# Altium PCB USB_Audio_DAC_REV1.PcbDoc
Units mil, origin at the board's own origin, x right, y up, seen from the top; angles counter-clockwise.
Board outline 2265 x 1500 mil, 2 copper layers (Top Layer, Bottom Layer); 55 components, 40 nets, 174 pads, 20 vias.
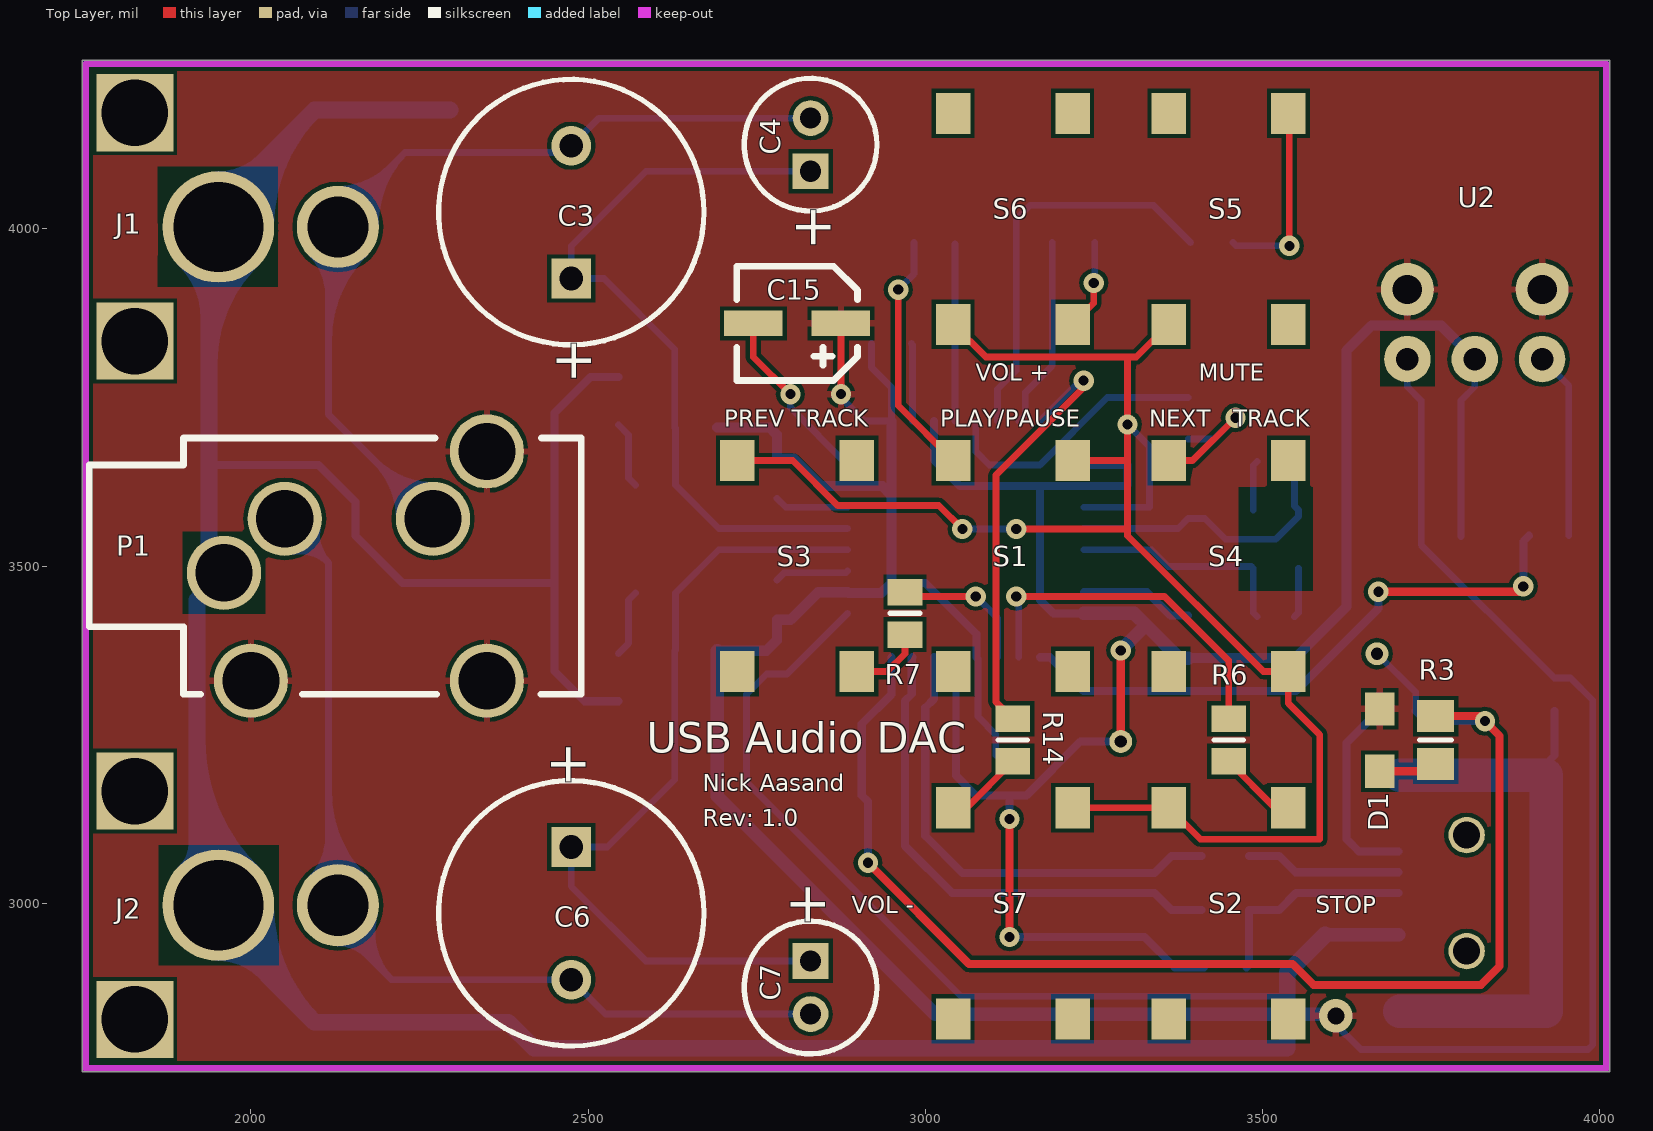
[diagram p0: Top Layer view]
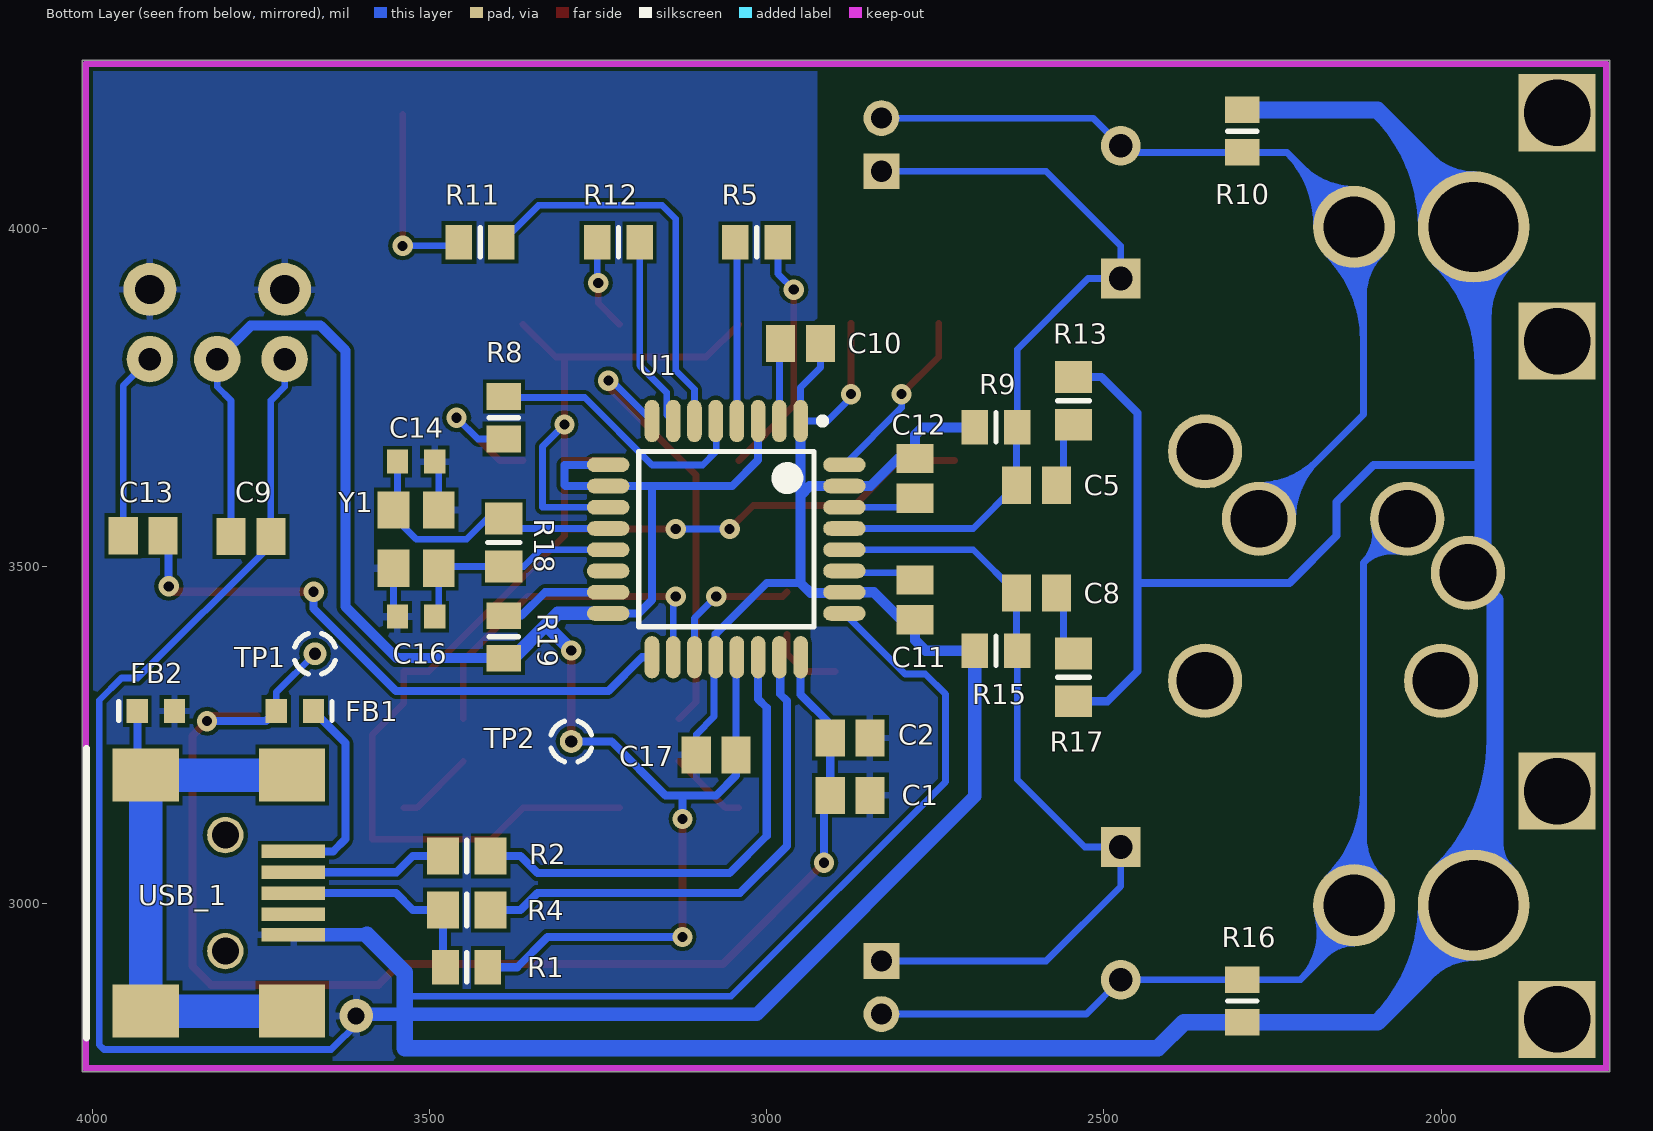
[diagram p1: Bottom Layer view, seen from below]

## Layer stack, top to bottom
Top Layer: signal copper 1.4
Dielectric: dielectric 12.6, FR-4, Dk 4.8
Bottom Layer: signal copper 1.4

## Board outline
1750,2750 4015,2750 4015,4250 1750,4250

## Design rules (kind name [scope] priority, off if disabled: settings)
Clearance [All] p1: gap=6
ComponentClearance [All] p1: gap=8 collisioncheckmode=3 verticalgap=8 showdistances=FALSE
HoleSize [All] p1: absolutevalues=TRUE maxlimit=250 minlimit=13 maxpercent=80.000 minpercent=20.000
MinimumAnnularRing [All] p1: minimumring=7
MinimumSolderMaskSliver [All] p1: minsoldermaskwidth=1
PolygonConnect [All] p1: connectstyle=Relief reliefconductorwidth=10 reliefentries=4 polygonreliefangle="90 Angle"
RoutingVias [All] p1: holewidth=13 width=27 viastyle="Through Hole" minholewidth=13 minwidth=27 maxholewidth=25 maxwidth=50
SilkscreenOverComponentPads [All] p1: minsilkscreentomaskgap=6
SolderMaskExpansion [All] p1: expansion=4
Width [All] p1: maxlimit=50 minlimit=8 preferedwidth=8 minimp=50.000000 maximp=50.000000 favimp=50.000000
24 further rules are at their usual default settings.

## Components (designator, comment, footprint, x,y, rotation, side; value= is the part's Value field where it differs from the comment)
C1 "0805" C0805 2876.38,3160 r180 bottom
C2 "0805" C0805 2876.38,3245 r180 bottom
C3 "Cap" CAPPR5-10x12.5 2475,4025 r90 top
C4 "Cap" CAPPR2-5x11 2830,4125 r90 top
C5 "0805" C0805 2600,3620 r180 bottom
C6 "Cap" CAPPR5-10x12.5 2475,2985 r270 top
C7 "Cap" CAPPR2-5x11 2830,2875 r270 top
C8 "0805" C0805 2600,3460 r180 bottom
C9 "Cap Semi" C0805 3765,3544 r180 bottom
C10 "0805" C0805 2950,3830 r180 bottom
C11 "0805" C0805 2780,3450 r270 bottom
C12 "0805" C0805 2780,3630 r90 bottom
C13 "Cap Semi" C0805 3925,3545 r0 bottom
C14 "0805" CAPC1608L 3520,3655 r0 bottom
C15 "Cap Pol3" Cap_ALUM_SMD 2745,3860 r0 top
C16 "0805" CAPC1608L 3520,3425 r180 bottom
C17 "0805" C0805 3075,3220 r0 bottom
D1 "LED2" "2.00mm L x 1.25mm W" 3674,3195.74 r90 top
FB1 "0603" INDC1608L 3700,3285 r0 bottom
FB2 "0603" INDC1608L 3906,3285 r180 bottom
J1 "RCJ-04X" RCJ-04X 2129,4003 r180 top
J2 "RCJ-04X" RCJ-04X 2129,2997 r180 top
P1 "SJ1-3533NS" SJ1-3533NS 1960,3530 r0 top
R1 "0805" RESC2012L 3445,2905 r0 bottom
R2 "Res3" 6-0805_N 3445,3070 r180 bottom
R3 "Res3" 6-0805_N 3757,3242 r90 top
R4 "Res3" 6-0805_N 3445,2990 r180 bottom
R5 "0805" RESC2012L 3015,3980 r0 bottom
R6 "0805" RESC2012L 3450,3242 r90 top
R7 "0805" RESC2012L 2970,3430 r90 top
R8 "0805" RESC2012L 3390,3720 r90 bottom
R9 "0805" RESC2012L 2660,3705.63 r180 bottom
R10 "0805" RESC2012L 2295,4145 r270 bottom
R11 "0805" RESC2012L 3425,3980 r180 bottom
R12 "0805" RESC2012L 3220,3980 r180 bottom
R13 "Res3" 6-0805_N 2545,3745 r270 bottom
R14 "0805" RESC2012L 3130,3242 r90 top
R15 "0805" RESC2012L 2660,3374.37 r180 bottom
R16 "0805" RESC2012L 2295,2855 r90 bottom
R17 "Res3" 6-0805_N 2545,3335 r90 bottom
R18 "Res3" 6-0805_N 3390,3535 r90 bottom
R19 "0805" RESC2012L 3390,3395 r270 bottom
S1 "SW" C&K_PTS645_SMD 3130,3500 r90 top
S2 "SW" C&K_PTS645_SMD 3450,2985 r270 top
S3 "SW" C&K_PTS645_SMD 2810,3500 r270 top
S4 "SW" C&K_PTS645_SMD 3450,3500 r90 top
S5 "SW" C&K_PTS645_SMD 3450,4015 r270 top
S6 "SW" C&K_PTS645_SMD 3130,4015 r270 top
S7 "SW" C&K_PTS645_SMD 3130,2985 r90 top
TP1 "Test point" Test_Pad 3670,3370 r0 bottom
TP2 "Test point" Test_Pad 3290,3240 r270 bottom
U1 "PCM2706C/7C" TQFP80P970X970X120-32N 3060,3540 r270 bottom
U2 "PLT133/T6A" PLT133/T10W 3715,3807 r0 top
USB_1 "USB-M2xFxx" USB-M2xFxx 3655,3015 r270 bottom
Y1 "12MHz" TXC-7M 3520,3540 r90 bottom

## Footprints (in the part's own frame and the unit in brackets; to place one, negate y for a bottom-side part, rotate by r counter-clockwise, add the part's x,y. Pads: shape width x height; smd on the part's side, far side on the other; paste and mask are expansions set on the pad)
"2.00mm L x 1.25mm W" [mm] "0805 SMT LED 2 Flat Leads"
  rect 1.25x1.1 smd: 1(0,0) 2(2.35,0)
6-0805_N [mm] "Chip Resistor, Body 2.0x1.2mm, IPC Medium Density"
  rect 1.2x1.4 smd: 1(-0.9,0) 2(0.9,0)
  silkscreen extent 0,-0.6 0,0.6, body extent -1.07,-0.7 1.07,0.7, height 0.7
C0805 [mm] "Chip Capacitor, Body 2.0x1.3mm, IPC High Density"
  rect 1.1x1.4 smd: 1(-0.75,0) 2(0.75,0)
  body extent -1.1,-0.72 1.1,0.72, height 1.4
C&K_PTS645_SMD [mm]
  rect 1.55x1.3 smd: 1(-3.975,2.25) 2(-3.975,-2.25) 3(3.975,2.25) 4(3.975,-2.25)
  body extent -3.13,-3.13 3.13,3.13, height 5
Cap_ALUM_SMD [mm] "Cap Electrolytic SMD Radial, Can"
  rect 2.2x0.95 smd: 1(0,0) 2(3.3,0)
  silkscreen extent -0.62,-2.15 3.92,2.15
CAPC1608L [mm] "Chip Capacitor, Body 1.6x0.8mm, IPC High Density"
  rect 0.8x0.9 smd: 1(-0.7,0) 2(0.7,0)
  body extent -0.87,-0.48 0.87,0.48, height 0.85
CAPPR2-5x11 [mm] "Capacitor, Electrolytic, Radial; Body 5 x 11 mm (Dia.xH typ); Pin Spacing 2 mm (typ)"
  rect 1.35x1.35 hole 0.8: 1(-1,0)
  round 1.35 hole 0.8: 2(1,0)
  silkscreen extent -2.5,-2.5 2.5,2.5
CAPPR5-10x12.5 [mm] "Capacitor, Electrolytic, Radial; Body 10 x 12.5 mm (Dia.xH typ); Pin Spacing 5 mm (typ)"
  rect 1.5x1.5 hole 0.9: 1(-2.5,0)
  round 1.5 hole 0.9: 2(2.5,0)
  silkscreen extent -5,-5 5,5
INDC1608L [mm] "Chip Inductor, Body 1.6x0.8mm, IPC High Density"
  rect 0.8x0.9 smd: 1(-0.7,0) 2(0.7,0)
  silkscreen extent -1.4,-0.35 -1.4,0.35, body extent -0.87,-0.48 0.87,0.48, height 0.55
PLT133/T10W [mm] "S/PDIF Optical Transmitter Integrated Drive Circuitry"
  round 1.75 hole 0.85: 1(0,0) 2(2.54,0) 3(5.08,0)
  round 2 hole 1.1: 4(0,2.625) 5(5.08,2.625)
RCJ-04X [mm] "RCJ-04X series RCA mono audio jack"
  round 4.2 hole 3.4: 1(4.5,0)
  round 3.1 hole 2.3: 2(0,0)
  rect 2.906x2.906 hole 2.5 unplated: 3(7.65,4.3) 4(7.65,-4.3)
RESC2012L [mm] "Chip Resistor, Body 2.0x1.3mm, IPC High Density"
  rect 1x1.3 smd: 1(-0.8,0) 2(0.8,0)
  silkscreen extent 0,-0.55 0,0.55, body extent -1.07,-0.7 1.07,0.7, height 0.65
SJ1-3533NS [mil] "Audio Jack"
  round 110 hole 85: 1(0,-40) 2(90,40) 3(310,40) 4(40,-200) 5(390,-200) 6(390,140)
  silkscreen extent -200,-220 530,160
Test_Pad [mil] "Test point pad"
  round 34 hole 18: 1(0,0)
  silkscreen extent -30,-30 30,30
TQFP80P970X970X120-32N [mm] "TQFP, 32-Leads, Body 9.7x9.7mm (max), Pitch 0.80mm, IPC Medium Density"
  oval 1.6x0.55 smd: 1(-4.45,2.8) 2(-4.45,2) 3(-4.45,1.2) 4(-4.45,0.4) 5(-4.45,-0.4) 6(-4.45,-1.2) 7(-4.45,-2) 8(-4.45,-2.8) 17(4.45,-2.8) 18(4.45,-2) 19(4.45,-1.2) 20(4.45,-0.4) 21(4.45,0.4) 22(4.45,1.2) 23(4.45,2) 24(4.45,2.8)
  oval 0.55x1.6 smd: 9(-2.8,-4.45) 10(-2,-4.45) 11(-1.2,-4.45) 12(-0.4,-4.45) 13(0.4,-4.45) 14(1.2,-4.45) 15(2,-4.45) 16(2.8,-4.45) 25(2.8,4.45) 26(2,4.45) 27(1.2,4.45) 28(0.4,4.45) 29(-0.4,4.45) 30(-1.2,4.45) 31(-2,4.45) 32(-2.8,4.45)
  silkscreen extent -4.57,-3.3 3.3,3.75, body extent -3.5,-3.5 3.5,3.5, height 1.2
TXC-7M [mm] "TXC 7M Series Crystal"
  rect 1.4x1.2 smd: 1(-1.1,-0.85) 2(1.1,-0.85) 3(1.1,0.85) 4(-1.1,0.85)
USB-M2xFxx [mil] "USB Mini B connector SMD"
  rect 20x94 smd: 1(-62,-47) 2(-31,-47) 3(0,-47) 4(31,-47) 5(62,-47)
  rect 79x98 smd: 6(-175,-49) 7(-175,-266) 8(175,-266) 9(175,-49)
  round 54 hole 40: ""(-86,-148) ""(86,-148)
  silkscreen extent -215,-354 215,-354

## Part data
C1 C2 C5 C8 C10 C11 C12 C14 C16 C17: library part "Cap Semi", "Capacitor (Semiconductor SIM Model)"
C3 C4 C6 C7: "Capacitor"
C9 C13: "Capacitor (Semiconductor SIM Model)"
C15: "Polarized Capacitor (Surface Mount)"
D1: "Typical RED, GREEN, YELLOW, AMBER GaAs LED"
FB1 FB2: library part Inductor, "Inductor"
J1 J2: "RCJ-04X series RCA connector"
P1: "CUI 3.5mm Audio Jack Shielded"
R1 R5 R6 R7 R8 R9 R10 R11 R12 R14 R15 R16 R19: library part Res3, "Resistor"
R2 R3 R4 R13 R17 R18: "Resistor"
S1 S2 S3 S4 S5 S6 S7: library part SPST-4, "SPST Tactile switch - generic"
TP1 TP2: library part Test_Pad, "Test point pad"
U1: library part PCM2707, "Stereo Audio DAC with USB Interface, Single-Ended Headphone Out, S/PDIF Output"
U2: "TRANSMITTER FBR OPT IR PHOTOLINK 660nm"
USB_1: "USB Mini-B for USB-M2xFxx"
Y1: library part XTAL-4, "Crystal Oscillator - 4 Pin"

## Via types
v1: diameter 30, hole 15, Top Layer to Bottom Layer, 19 vias
v2: diameter 50, hole 25, Top Layer to Bottom Layer, 1 vias

## Nets (pads, with @x,y where several pads share a name; then routed paths per layer and width w, separated by ;. In a path a pad name is that pad's centre, name@x,y a point inside that pad or via, vN(x,y) a via of type N, cw(c..) or ccw(c..) an arc to the next point about the centre after c; other vN are vias at no path point)
FUNC0: R8.2 U1.5 | length 410.2
  Bottom Layer w10: U1.5 3075,3714.45 3075,3670 3095,3650 3170,3650 3270,3750 R8.2@3390,3750
FUNC1: R7.2 U1.19 | length 211.2
  Top Layer w10: R7.2 2976.5,3455 v1(3075,3455)
  Bottom Layer w10: v1(3075,3455) 3107.24,3422.76 U1.19
FUNC2: R6.2 U1.18 | length 532.6
  Top Layer w10: v1(3135,3455) 3355,3455 3450,3360 R6.2
  Bottom Layer w10: v1(3135,3455) 3138.74,3451.26 U1.18
FUNC3: R5.2 U1.4 | length 262.6
  Bottom Layer w10: U1.4 R5.2@3044.25,3977.76
GND: C1.2 C2.2 C9.2 C10.2 C11.2 C12.2 C14.1 C15.2 C16.1 C17.2 D1.2 FB2.2 J1.1 J2.1 P1.1 P1.4 P1.5 P1.6 R9.1 R10.1 R13.1 R15.1 R16.1 R17.1 U1.1 U1.20 U1.25 U1.26 U1.31 U2.1 U2.4 U2.5 USB_1.5 Y1.2 Y1.4 | length 12542.1
  Top Layer w10: v1@2874.92,3750.08 v1@2875,3750 ; C15.2 2875,3859.92 v1(2875,3755)
  Bottom Layer w10: v1(2875,3755) 2875,3750 2909.8,3715.2 U1.1 2950,3715.43 2950,3765 2920.47,3794.53 C10.2 ; U1.25 2795.04,3340 2765,3340 2735,3310 2735,3180 3053,2862 3537,2862 ; U1.26 U1.26@2886.06,3460 ; U1.20 3078.13,3362.43 3078.13,3276.87 3104.53,3250.47 C17.2 ; Y1.2 3486.54,3649.09 C14.1 ; C16.1 3553.46,3430.91 Y1.4 ; v2@3605,2835 3605,2824 3646,2783 3983,2783 3990,2790 3990,3301 3957,3334 3933,3334 3735.47,3531.53 C9.2 3735.47,3745.53 3715,3766 U2.1
  Bottom Layer w12: 1937.83,3650 2100,3650 2155,3595 2155,3545 2225,3475 2450,3475 ; R17.1 2494.43,3299.57 2450,3344 2450,3475 ; R13.1 2503.43,3780.43 2450,3727 2450,3475 ; 2950,3475 3000,3475 3075.75,3399.25 U1.20 ; 3537,2862 3542,2862
  Bottom Layer w15: R15.1 2764.37,3374.37 2780,3390 C11.2 2800.47,3420.47 2841.26,3461.26 U1.26 ; R9.1 2769.37,3705.63 2780,3695 C12.2 2805.47,3659.53 2846.26,3618.74 U1.31 2936.26,3618.74 2949.76,3605.24 ; U1.26@2886.06,3460 2935,3460 2950,3475 2950,3605 2949.76,3605.24 ; U1.1 2949.76,3605.24
  Bottom Layer w20: R15.1 2691.5,3158.5 3015,2835 3537,2835 3605,2835 v2@3607,2833 ; 3593,2953 USB_1.5
  Bottom Layer w25: J2.1@1902.21,3046.62 ccw(c1859.27,3089.57) 1920,3089.57 ; J1.1@1902.21,3953.38 cw(c1816.21,3867.38) 1937.83,3867.38 ; 1920,3122.57 ccw(c2077.4,3122.57) J2.1@1966.1,3011.27 ; 1920,3182.92 ccw(c2137.76,3182.92) J2.1@1983.78,3028.95 ; 1920,3243.28 ccw(c2198.11,3243.28) J2.1@2001.46,3046.62 ; 1937.83,3799.78 cw(c2155.06,3799.78) J1.1@2001.46,3953.38 ; 1937.83,3860.13 cw(c2094.7,3860.13) J1.1@1983.78,3971.05 ; 1937.83,3920.49 cw(c2034.35,3920.49) J1.1@1966.1,3988.73 ; J2.1@1951.83,2926.82 cw(c1951.83,2832.24) 2018.71,2899.12 ; J1.1@1951.83,4073.18 ccw(c1951.83,4167.76) 2018.71,4100.88 ; J2.1@1972.01,2997 ccw(c2095.56,2997) 2008.2,2909.64 ; J1.1@1972.01,4003 cw(c2095.56,4003) 2008.2,4090.36 ; J2.1@1997.01,2997 ccw(c2180.92,2997) 2050.88,2866.96 ; J1.1@1997.01,4003 cw(c2180.92,4003) 2050.88,4133.04 ; J2.1@2022.01,2997 ccw(c2266.27,2997) 2093.55,2824.28 ; J1.1@2022.01,4003 cw(c2266.27,4003) 2093.55,4175.72 ; R10.1 2094.33,4176.5 1951.83,4034 J1.1 1937.83,3989 1937.83,3650 1937.83,3512.17 P1.1 1920,3450 1920,3028.83 J2.1 1951.83,2966 2094.33,2823.5 R16.1 2381.5,2823.5 2420,2785 3537,2785 3537,2835 3537,2862 3537,2897 3593,2953
  other v2: 3609,2833
HID0: R11.2 U1.6 | length 600.9
  Bottom Layer w10: U1.6 3107.24,3762.24 3135,3790 3135,4015 3155,4035 3338.5,4035 R11.2
HID1: R12.2 U1.7 | length 285.4
  Bottom Layer w10: U1.7 3148.41,3724.87 3148.41,3757.69 3188.5,3797.79 R12.2
HID2: R14.2 U1.8 | length 655.2
  Top Layer w10: R14.2 3105,3298.5 3105,3635 3235,3765 v1(3235,3775)
  Bottom Layer w10: U1.8 3230.04,3775 v1(3235,3775)
NetC3_2: C3.2 C4.2 J1.2 P1.3 R10.2 | length 2940.3
  Bottom Layer w10: J1.2@2089.39,3963.39 cw(c2027.55,3901.55) 2115,3901.55 ; J1.2@2096.46,3970.46 cw(c2051.69,3925.69) 2115,3925.69 ; 2115,3833.95 cw(c2298.05,3833.95) J1.2@2168.61,3963.39 ; 2115,3858.09 cw(c2273.91,3858.09) J1.2@2161.54,3970.46 ; 2115,3882.23 cw(c2249.77,3882.23) J1.2@2154.47,3977.53 ; 2115,3906.37 cw(c2225.63,3906.37) J1.2@2147.4,3984.6 ; 2115,3930.52 cw(c2201.48,3930.52) J1.2@2140.33,3991.67 ; J1.2@2129,4039.02 ccw(c2129,4099.44) 2171.72,4056.72 ; J1.2@2129,4049.02 ccw(c2129,4133.58) 2188.79,4073.79 ; J1.2@2129,4059.02 ccw(c2129,4167.72) 2205.86,4090.86 ; J1.2@2155.01,4003.68 cw(c2237.41,4005.85) 2179.13,4064.13 ; J1.2@2165.01,4003.95 cw(c2269.48,4006.69) 2195.58,4080.58 ; J1.2@2175.01,4004.21 cw(c2301.55,4007.53) 2212.04,4097.04 ; J1.2@2185,4004.47 cw(c2333.62,4008.37) 2228.5,4113.5 ; P1.3@2220,3570 ccw(c2099.29,3570) 2184.64,3655.36 ccw(c2270,3740.71) P1.3@2270,3620 ; P1.3@2230,3570 ccw(c2133.43,3570) 2201.72,3638.28 ccw(c2270,3706.57) P1.3@2270,3610 ; P1.3@2240,3570 ccw(c2167.57,3570) 2218.79,3621.21 ccw(c2270,3672.43) P1.3@2270,3600 ; P1.3 2115,3725 2115,3989 J1.2 2129,4014 2228.5,4113.5 ; C3.2@2465.08,4113.5 R10.2 2228.5,4113.5 ; C3.2 2515.94,4164.37 C4.2
NetC5_2: C5.2 R13.2 | length 100.1
  Bottom Layer w10: R13.2 2560,3694.57 2560,3630.47 C5.2
NetC6_2: C6.2 C7.2 J2.2 P1.2 R16.2 | length 2815.2
  Bottom Layer w10: P1.2 2115,3505 ; P1.2@2056.28,3540.67 cw(c2063.76,3505.76) 2089,3531 cw(c2114.24,3556.24) P1.2@2079.33,3563.72 ; P1.2@2058.38,3530.89 cw(c2068.34,3484.35) 2102,3518 cw(c2135.65,3551.66) P1.2@2089.11,3561.62 ; P1.2@2060.47,3521.11 cw(c2072.93,3462.93) 2115,3505 ; J2.2@2089.39,3036.61 ccw(c2027.55,3098.45) 2115,3098.45 ; J2.2@2096.46,3029.54 ccw(c2051.69,3074.31) 2115,3074.31 ; P1.2@2098.89,3559.53 ccw(c2157.07,3547.07) 2115,3505 ; 2115,3069.48 ccw(c2201.48,3069.48) J2.2@2140.33,3008.33 ; 2115,3093.63 ccw(c2225.63,3093.63) J2.2@2147.4,3015.4 ; 2115,3117.77 ccw(c2249.77,3117.77) J2.2@2154.47,3022.47 ; 2115,3141.91 ccw(c2273.91,3141.91) J2.2@2161.54,3029.54 ; 2115,3166.05 ccw(c2298.05,3166.05) J2.2@2168.61,3036.61 ; J2.2@2129,2940.98 cw(c2129,2880.56) 2171.72,2923.28 ; J2.2@2129,2950.98 cw(c2129,2914.71) 2154.65,2940.35 ; J2.2@2144.46,2992.79 ccw(c2201.69,2977.2) 2159.75,2935.25 ; J2.2@2154.11,2990.16 ccw(c2220.85,2971.98) 2171.93,2923.07 ; J2.2@2163.76,2987.53 ccw(c2240,2966.76) 2184.12,2910.88 ; J2.2@2173.4,2984.9 ccw(c2259.16,2961.54) 2196.31,2898.69 ; J2.2@2183.05,2982.27 ccw(c2278.32,2956.32) 2208.5,2886.5 ; R16.2 2208.5,2886.5 ; R16.2@2295.08,2886.57 C6.2 2525.94,2835.63 C7.2 ; 2115,3505 2115,3011 J2.2 2129,2966 2208.5,2886.5
NetC8_2: C8.2 R17.2 | length 100.1
  Bottom Layer w10: R17.2 2560,3385.43 2560,3449.53 C8.2
NetC10_1: C10.1 U1.2 | length 115.5
  Bottom Layer w10: C10.1 2981.26,3828.27 U1.2
NetC11_1: C11.1 U1.27 | length 110.3
  Bottom Layer w10: C11.1 2790.47,3490 2882.05,3490 U1.27
NetC12_1: C12.1 U1.30 | length 110.3
  Bottom Layer w10: C12.1 2793.23,3587.24 U1.30
NetC13_1: C13.1 U1.17 | length 894.7
  Top Layer w12: v1(3672,3462) 3879,3462 v1(3887,3470)
  Bottom Layer w12: U1.17 3185.2,3364.8 3235,3315 3550,3315 3672,3437 v1(3672,3462) ; v1(3887,3470) 3887,3536.53 C13.1
NetC13_2: C13.2 U2.3 | length 278.4
  Bottom Layer w10: U2.3 3954.53,3767.47 C13.2
NetC14_2: C14.2 R18.2 U1.12 Y1.3 | length 434.8
  Bottom Layer w10: U1.12 3375.32,3555.75 R18.2 3414.57,3570.43 3445,3540 3520,3540 3553.46,3573.46 Y1.3 3547.56,3589.21 C14.2
NetC15_1: C15.1 U1.32 | length 267.7
  Top Layer w10: C15.1 2745,3810 v1(2800,3755)
  Bottom Layer w10: v1(2800,3755) 2800,3735.04 U1.32
NetC16_2: C16.2 R18.1 U1.13 Y1.1 | length 336.9
  Bottom Layer w10: U1.13 3335.75,3524.25 3360.43,3499.57 R18.1 3483.66,3499.57 Y1.1 3486.54,3430.91 C16.2
NetD1_1: D1.1 R3.1 | length 87.5
  Top Layer w12: D1.1 3746.17,3195.74 R3.1
NetFB1_1: FB1.1 USB_1.1 | length 294.1
  Bottom Layer w12: FB1.1 3625,3237.56 3625,3095 3643,3077 USB_1.1
NetFB2_1: FB2.1 USB_1.6 USB_1.7 USB_1.8 USB_1.9 | length 879.3
  Bottom Layer w12: USB_1.7@3912.56,3198.44 3933.56,3219.44 FB2.1
  Bottom Layer w50: USB_1.9 USB_1.8 USB_1.7 USB_1.6
NetR1_2: R1.2 R4.1 USB_1.3 | length 318.6
  Bottom Layer w12: R1.2 3480.43,2908.94 R4.1 3525,2990 3550,3015 USB_1.3
NetR2_1: R2.1 USB_1.2 | length 231.5
  Bottom Layer w12: R2.1 3525,3070 3549,3046 USB_1.2
NetR5_1: R5.1 S1.1 S1.3 | length 367
  Top Layer w10: v1(2960,3910) 2960,3737.91 S1.3
  Bottom Layer w10: v1(2960,3910) 2983.5,3933.5 R5.1
NetR6_1: R6.1 S2.1 S2.3 | length 117.2
  Top Layer w10: R6.1 3519.01,3141.5 S2.1
NetR7_1: R7.1 S3.1 S3.3 | length 110.9
  Top Layer w10: S3.3 2943.5,3343.5 2970,3370 R7.1
NetR8_1: R8.1 S4.1 S4.3 | length 207.9
  Top Layer w10: S4.3 3396.5,3656.5 v1(3460,3720)
  Bottom Layer w10: R8.1 3428.5,3688.5 v1(3460,3720)
NetR11_1: R11.1 S5.1 S5.3 | length 280.7
  Top Layer w10: v1(3540,3975) S5.1@3540,4170.08
  Bottom Layer w10: R11.1 3461.5,3975 v1(3540,3975)
NetR12_1: R12.1 S6.1 S6.3 | length 135.1
  Top Layer w10: S6.3 3250,3889.92 v1(3250,3920)
  Bottom Layer w10: v1(3250,3920) 3251.5,3921.5 R12.1
NetR14_1: R14.1 S7.1 S7.3 | length 117.2
  Top Layer w10: S7.3 3060.99,3141.5 R14.1
NetR19_1: R19.1 U1.15 | length 169.2
  Bottom Layer w12: U1.15 3328.74,3461.26 3363.5,3426.5 R19.1
S\S\P\N\D\: S1.2 S1.4 S2.2 S2.4 S3.2 S3.4 S4.2 S4.4 S5.2 S5.4 S6.2 S6.4 S7.2 S7.4 U1.11 | length 2542.2
  Top Layer w10: S3.2 2803.5,3656.5 2870,3590 3020,3590 v1(3055,3555) v1@3060,3555 ; S6.4 3089.92,3810 3300,3810 ; v1(3135,3555) 3300,3555 ; S7.4 S2.2 3407.91,3095 3585,3095 3585,3250 3538.58,3296.42 S4.2 3501.5,3343.5 3300,3545 3300,3555 ; S1.4 3298.5,3656.5 3300,3655 ; S5.4 3312.91,3810 3300,3810 ; 3300,3555 3300,3655 ; 3300,3655 v1(3300,3710) 3300,3810
  Bottom Layer w10: v1(3055,3555) v1(3135,3555) ; U1.11 3332.76,3587.24 3332.76,3677.24 v1(3300,3710)
USB1_D_N: R2.2 U1.22 | length 712.8
  Bottom Layer w12: U1.22 3012.76,3302.76 3000,3290 3000,3100 3055,3045 3265,3045 3340,3045 3365,3070 R2.2
USB1_D_P: R4.2 U1.23 | length 763.2
  Bottom Layer w12: U1.23 2980,3363.54 2980,3310 2970.23,3300.23 2970.23,3084.77 3040,3015 3340,3015 3365,2990 R4.2
VBUS1: C1.1 C2.1 FB1.2 R3.2 TP1.1 U1.24 | length 2016
  Top Layer w12: v1(2915,3060) 3065,2910 3545,2910 3576,2879 3824,2879 3852,2907 3852,3248 v1(3830,3270) 3822.57,3277.43 R3.2
  Bottom Layer w10: TP1.1 3727.56,3312.44 FB1.2
  Bottom Layer w12: v1(2915,3060) 2915,3150.91 C1.1 C2.1 2905.91,3265.91 2949.76,3309.76 U1.24 ; FB1.2 3742.56,3270 v1(3830,3270)
VDD: C9.1 C17.1 R1.1 R19.2 TP2.1 U1.3 U1.9 U1.10 U1.16 U1.21 U2.2 | length 3191.5
  Top Layer w12: v1(3125,2950) v1(3125,3125) ; TP2.1 v1(3290,3375)
  Bottom Layer w10: C17.1 U1.21@3045.47,3363.58 ; C9.1 3794.53,3745.53 3815,3766 U2.2
  Bottom Layer w12: U1.3 3012.76,3657.24 3051.26,3618.74 U1.10 3298.74,3618.74 3300,3620 3300,3650 U1.9@3235.43,3650 ; C17.1 3045.47,3189.53 3075,3160 3125,3160 ; v1(3125,2950) 3325,2950 3370,2905 R1.1 ; v1(3125,3125) 3125,3160 ; 3170.24,3615 3170.24,3449.76 3190.24,3429.76 U1.16 ; TP2.1 3230,3240 3150,3160 3125,3160 ; 3325,3410 3330,3410
  Bottom Layer w15: R19.2 3548.5,3363.5 3625,3440 3625,3820 3661.66,3856.66 3765.34,3856.66 U2.2
  Bottom Layer w20: U1.16 3310.24,3429.76 3330,3410 3376.5,3363.5 R19.2 ; v1(3290,3375) 3325,3410
VOUT_L: C6.1 C7.1 C8.1 R15.2 U1.28 | length 1211.6
  Bottom Layer w10: R15.2 2628.5,3183.5 2528.43,3083.43 C6.1 2475,3025 2585.63,2914.37 C7.1 ; R15.2@2629.53,3375.39 C8.1 2693.78,3524.25 U1.28
VOUT_R: C3.1 C4.1 C5.1 R9.2 U1.29 | length 1128.6
  Bottom Layer w10: R9.2 2628.5,3821.5 2523.43,3926.57 C3.1 2475,3975 2585.63,4085.63 C4.1 ; R9.2@2629.53,3704.61 C5.1 2693.78,3555.75 U1.29
pads on no net: J1.3 J1.4 J2.3 J2.4 U1.14 USB_1. USB_1.4

## Polygon pours and split planes (outlines as drawn)
GND on Top Layer "GND_TopLayer" (solid, remove dead copper, pour order 15): 1750,4250 4015,4250 4015,2750 1750,2750
GND on Bottom Layer "GND_BotLayer" (solid, remove dead copper, pour order 19): 2935,3410 2730,3410 2730,2750 2935,2750
GND on Bottom Layer "GND_BotLayer" (solid, remove dead copper, pour order 17): 2925,4250 4015,4250 4015,2750 2925,2750

## Keep-outs
Keep-Out Layer:
  lines w10: 1755,2755 1755,4245 ; 1760,2755 4010,2755 4010,4245 1760,4245

## Other copper
Top Layer:
  pour cut-out: 3465,3616.87 3575,3616.87 3575,3463.13 3465,3463.13
  pour cut-out: 3711,3766.86 3710.86,3767 3675,3767 3675,3848 3756,3848 3756,3767 3755.86,3766.86
  pour cut-out: 1899.2,3495 1899,3495.2 1899,3551 1986.98,3551 2003,3532 2021,3510 2021,3429 1899,3429
  pour cut-out: 1862.22,4008 1862,4008.22 1862,4092 2040,4092 2040,3914 1862,3914
  pour cut-out: 1863.11,3002 1862.89,3002.22 1862.89,3086 2040.89,3086 2040.89,2908 1862.89,2908
Bottom Layer:
  pour cut-out: 2894.96,3863.55 2915.47,3863.56 2925,3863.56 2945.99,3863.56 2946,3797 2895,3797
  pour cut-out: 3465,3616.87 3575,3616.87 3575,3549.75 3583.09,3549.75 3583.09,3530.25 3575,3530.25 3575,3463.13 3465,3463.13
  pour cut-out: 3711,3766.86 3710.86,3767 3675,3767 3675,3848 3756,3848 3756,3767 3755.86,3766.86
  pour cut-out: 3707.82,3577.56 3707.84,3577.54 3763.03,3577.54 3763.03,3510.44 3763.02,3510.44 3707.82,3510.44

## Silkscreen, mask and mechanical layers (free items; w line width, h text height)
Top Overlay:
  text "VOL +" at 3075,3775.07 h25
  text "MUTE" at 3406,3775 h25
  text "PREV TRACK" at 2702,3707 h25
  text "PLAY/PAUSE" at 3022,3707 h25
  text "NEXT   TRACK" at 3332.5,3707 h25
  text "USB Audio DAC" at 2587,3223 h45
  text "Nick Aasand" at 2670,3166 h25
  text "Rev: 1.0" at 2670,3114 h25
  text "VOL -" at 2891,2985 h25
  text "STOP" at 3579,2985 h25
Drill Drawing:
  text ".LEGEND" at 4450,3200 h60
  text "Drill Drawing." at 4450,3100 h60

## Dimensions
1755,2735 to 4010,2735 on Mechanical 1
1755,2755 to 1755,4245 on Mechanical 1

## Text inside footprints (layer, text, board x,y; h text height)
C3: Top Overlay "+" at 2504.53,3770.47 h59.06 r90
C4: Top Overlay "+" at 2859.53,3968.5 h59.05 r90
C6: Top Overlay "+" at 2445.47,3239.53 h59.06 r270
C7: Top Overlay "+" at 2800.47,3031.5 h59.05 r270